# Altium PCB main_pcb2.PcbDoc
Units mm, origin at the board's own origin, x right, y up, seen from the top; angles counter-clockwise.
Board outline 20 x 50 mm, 2 copper layers (Top Layer, Bottom Layer); 44 components, 28 nets, 160 pads, 32 vias.
Unrouted connection lines stored in the file: 110.
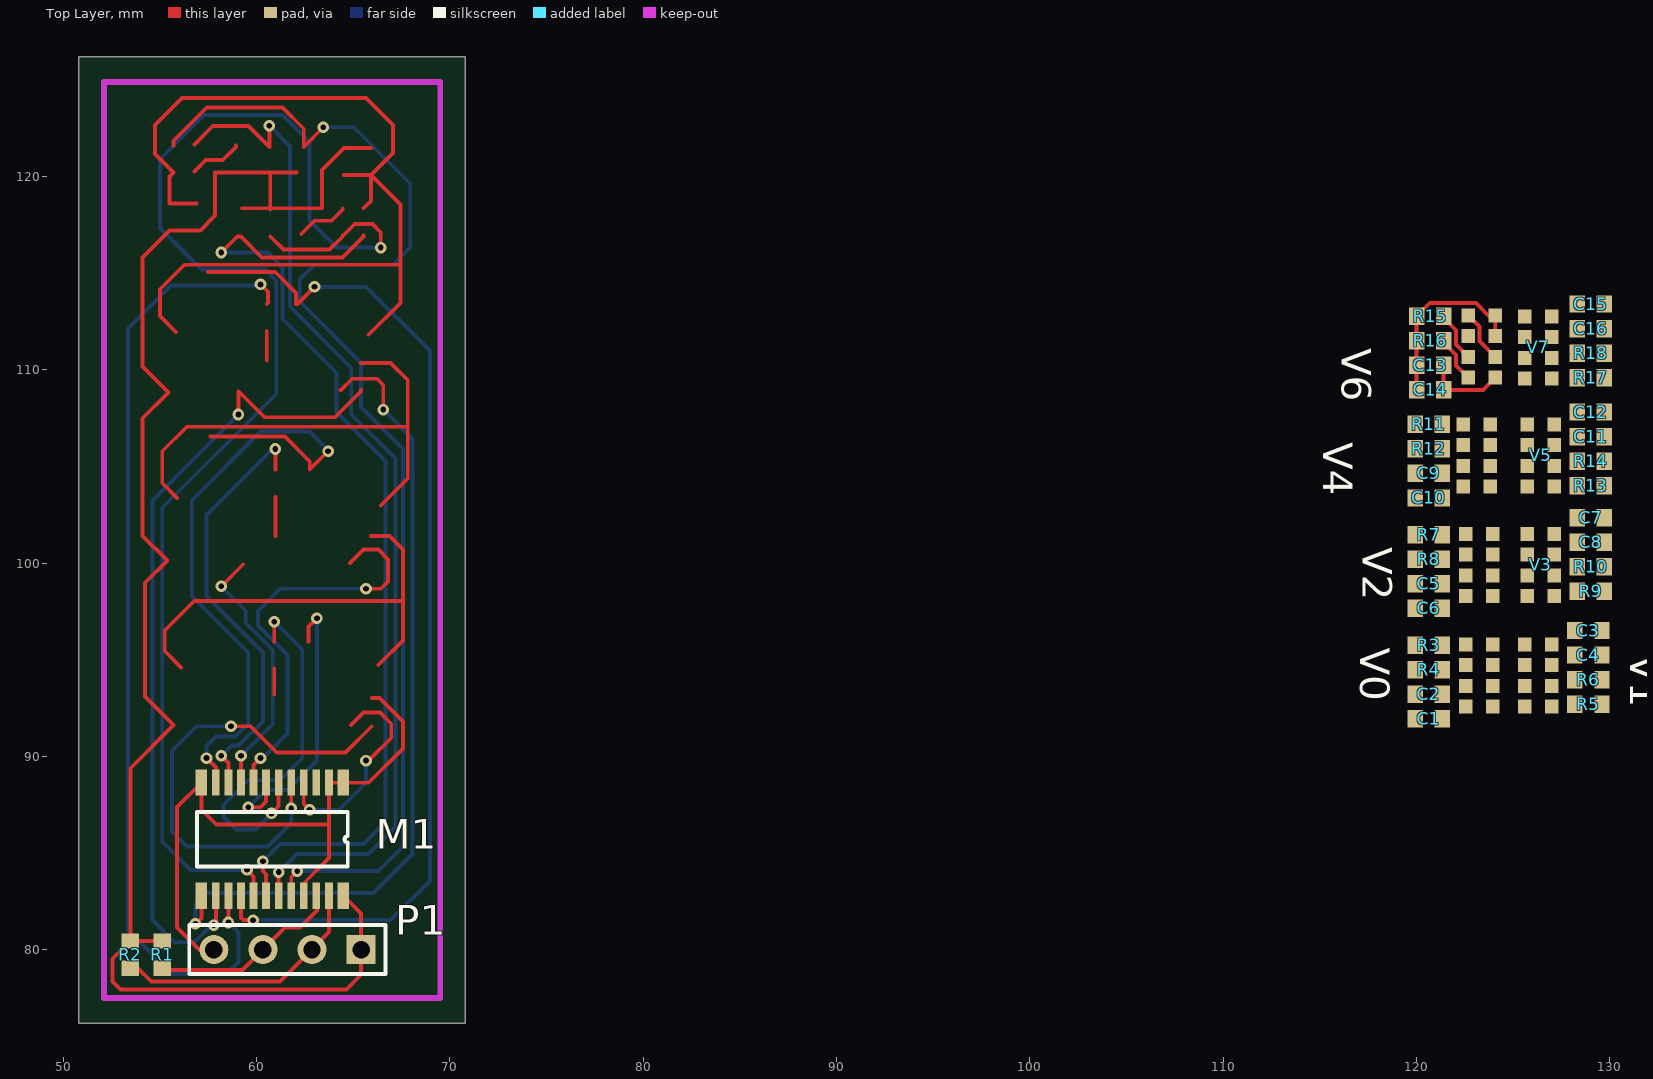
[diagram p0: Top Layer view]
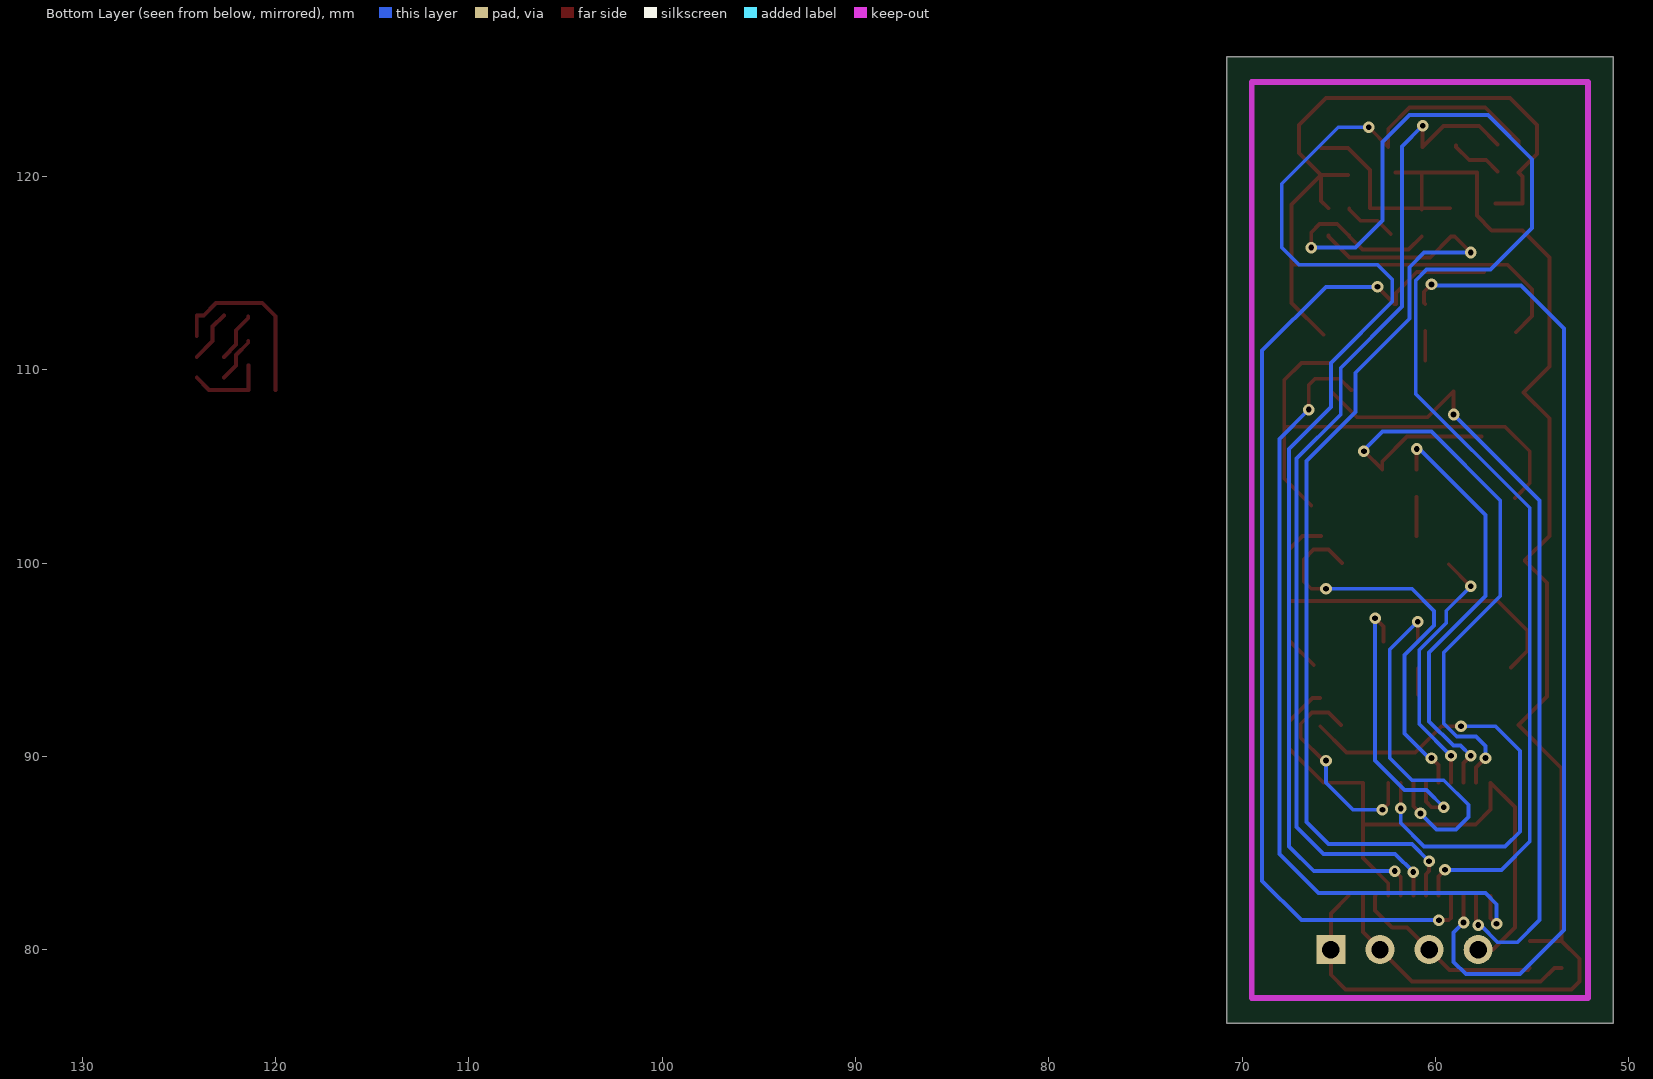
[diagram p1: Bottom Layer view, seen from below]

## Layer stack, top to bottom
Top Solder: solder mask 0.0102, Solder Resist, Dk 3.5
Top Layer: signal copper 0.0356
Dielectric 1: dielectric 0.32, FR-4, Dk 4.8
Bottom Layer: signal copper 0.0356
Bottom Solder: solder mask 0.0102, Solder Resist, Dk 3.5

## Board outline
50.8,76.2 70.8,76.2 70.8,126.2 50.8,126.2

## Design rules (kind name [scope] priority, off if disabled: settings)
Clearance [All] p1: gap=0.13
FabricationTestPointUsage TestPointUsage [All] p1: valid=0 allowmultiple=FALSE
FabricationTestpoint Testpoint [All] p1: side=3 testpointundercomponent=TRUE minsize=1.016 maxsize=2.54 preferedsize=1.524 minholesize=0 maxholesize=1.016 preferedholesize=0.813 testpointgrid=0.025 allowsidetop=TRUE allowsidebottom=TRUE usegrid=TRUE gridtolerance=0
HoleSize [All] p1: absolutevalues=TRUE maxlimit=3.9 minlimit=0.2 maxpercent=80.000 minpercent=20.000
HoleToHoleClearance [All] p1: gap=0.3 allowstackedmicrovias=TRUE
MinimumSolderMaskSliver [All] p1: minsoldermaskwidth=0.1
PlaneConnect [All] p1: planeconnectstyle=Relief reliefexpansion=0.5 reliefentries=4 reliefconductorwidth=0.4 reliefairgap=0.4
PolygonConnect [All] p1: connectstyle=Relief reliefconductorwidth=0.4 reliefentries=4 polygonreliefangle="90 Angle" airgapwidth=0.4
RoutingVias [All] p1: holewidth=0.3 width=0.6 viastyle="Through Hole" minholewidth=0.3 minwidth=0.6 maxholewidth=0.3 maxwidth=0.6
SilkToBoardRegionClearance UnpouredPolygon [All] p2:
SilkToSilkClearance [All] p1: silktosilkclearance=0
SilkToSolderMaskClearance SilkscreenOverComponentPads [IsPad] p1: minsilkscreentomaskgap=0 clearancetoexposedcopper=TRUE
SolderMaskExpansion [All] p1: expansion=-0.01
Width Power_Width [(InNet('5V') OR InNet('3V3') OR InNet('VCC') OR InNet('GND'))] p1: maxlimit=1 minlimit=0.2 preferedwidth=1 minimp=50.000000 maximp=50.000000 favimp=50.000000
Width [All] p2: maxlimit=1 minlimit=0.2 preferedwidth=0.2 minimp=50.000000 maximp=50.000000 favimp=50.000000
21 further rules are at their usual default settings.

## Classes and differential pairs
component class main_schematic: C13 C14 M1 P1 R1 R2 R15 R16 V6

## Components (designator, comment, footprint, x,y, rotation, side; value= is the part's Value field where it differs from the comment)
C1 "Cap" 1608[0603] 120.65,91.948 r180 top
C2 "Cap" 1608[0603] 120.65,93.218 r180 top
C3 "Cap" 1608[0603] 128.905,96.52 r0 top
C4 "Cap" 1608[0603] 128.905,95.25 r0 top
C5 "Cap" 1608[0603] 120.65,98.933 r180 top
C6 "Cap" 1608[0603] 120.65,97.663 r180 top
C7 "Cap" 1608[0603] 129.032,102.362 r0 top
C8 "Cap" 1608[0603] 129.032,101.092 r0 top
C9 "Cap" 1608[0603] 120.65,104.648 r180 top
C10 "Cap" 1608[0603] 120.65,103.378 r180 top
C11 "Cap" 1608[0603] 129.032,106.553 r0 top
C12 "Cap" 1608[0603] 129.032,107.823 r0 top
C13 "Cap" 1608[0603] 120.712,110.236 r180 top
C14 "Cap" 1608[0603] 120.712,108.966 r180 top
C15 "Cap" 1608[0603] 129.032,113.411 r0 top
C16 "Cap" 1608[0603] 129.032,112.141 r0 top
M1 "PCA9547" TSSOP24 64.389,88.646 r270 top
P1 "Header 4" HDR1X4 65.405,80.01 r180 top
R1 "Res1" 1608[0603] 55.118,79.756 r90 top
R2 "Res1" 1608[0603] 53.467,79.756 r90 top
R3 "Res1" 1608[0603] 120.65,95.758 r180 top
R4 "Res1" 1608[0603] 120.65,94.488 r180 top
R5 "Res1" 1608[0603] 128.905,92.71 r0 top
R6 "Res1" 1608[0603] 128.905,93.98 r0 top
R7 "Res1" 1608[0603] 120.65,101.473 r180 top
R8 "Res1" 1608[0603] 120.65,100.203 r180 top
R9 "Res1" 1608[0603] 129.032,98.552 r0 top
R10 "Res1" 1608[0603] 129.032,99.822 r0 top
R11 "Res1" 1608[0603] 120.65,107.188 r0 top
R12 "Res1" 1608[0603] 120.65,105.918 r0 top
R13 "Res1" 1608[0603] 129.032,104.013 r0 top
R14 "Res1" 1608[0603] 129.032,105.283 r0 top
R15 "Res1" 1608[0603] 120.712,112.776 r0 top
R16 "Res1" 1608[0603] 120.712,111.506 r0 top
R17 "Res1" 1608[0603] 129.032,109.601 r180 top
R18 "Res1" 1608[0603] 129.032,110.871 r180 top
V0 "VCNL4040" SOP8 123.955,92.583 r180 top
V1 "VCNL4040" SOP8 125.6,95.808 r0 top
V2 "VCNL4040" SOP8 123.955,98.298 r180 top
V3 "VCNL4040" SOP8 125.73,101.523 r0 top
V4 "VCNL4040" SOP8 123.828,103.963 r180 top
V5 "VCNL4040" SOP8 125.73,107.188 r0 top
V6 "VCNL4040" SOP8 124.079,109.601 r180 top
V7 "VCNL4040" SOP8 125.6,112.776 r0 top

## Footprints (in the part's own frame and the unit in brackets; to place one, negate y for a bottom-side part, rotate by r counter-clockwise, add the part's x,y. Pads: shape width x height; smd on the part's side, far side on the other; paste and mask are expansions set on the pad)
1608[0603] [mm] "Chip Capacitor, Body 1.6x0.8mm, IPC High Density"
  rect 0.8x0.9 smd: 1(-0.7,0) 2(0.7,0)
  body extent -0.87,-0.48 0.87,0.48, height 1.3
HDR1X4 [mm] "Connector; Header; 4 Position"
  rect 1.5x1.5 hole 0.9: 1(0,0)
  round 1.5 hole 0.9: 2(2.54,0) 3(5.08,0) 4(7.62,0)
  silkscreen extent -1.27,-1.27 8.89,1.27
SOP8 [mm]
  rect 0.7x0.725 smd: 1(0,0) 2(0,-1.075) 3(0,-2.15) 4(0,-3.225) 5(1.4,-3.225) 6(1.4,-2.15) 7(1.4,-1.075) 8(1.4,0)
TSSOP24 [mm]
  rect 1.35x0.6 smd: 1(0,0.1) 12(0,-7.25) 13(5.85,-7.25) 24(5.85,0.1)
  rect 1.35x0.4 smd: 2(0,-0.65) 3(0,-1.3) 4(0,-1.95) 5(0,-2.6) 6(0,-3.25) 7(0,-3.9) 8(0,-4.55) 9(0,-5.2) 10(0,-5.85) 11(0,-6.5) 14(5.85,-6.5) 15(5.85,-5.85) 16(5.85,-5.2) 17(5.85,-4.55) 18(5.85,-3.9) 19(5.85,-3.25) 20(5.85,-2.6) 21(5.85,-1.95) 22(5.85,-1.3) 23(5.85,-0.65)
  silkscreen extent 1.51,-7.48 4.34,0.33

## Part data
C1 C2 C3 C4 C5 C6 C7 C8 C9 C10 C11 C12 C13 C14 C15 C16: "Capacitor"
P1: "Header, 4-Pin"
R1 R2 R3 R4 R5 R6 R7 R8 R9 R10 R11 R12 R13 R14 R15 R16 R17 R18: "Resistor"
V0 V1 V2 V3 V4 V5 V6 V7: library part Component_1

## Via types
v1: diameter 0.6, hole 0.3, Top Layer to Bottom Layer, 32 vias

## Nets (pads, with @x,y where several pads share a name; then routed paths per layer and width w, separated by ;. In a path a pad name is that pad's centre, name@x,y a point inside that pad or via, vN(x,y) a via of type N, cw(c..) or ccw(c..) an arc to the next point about the centre after c; other vN are vias at no path point)
GND: C1.1 C2.1 C3.1 C4.1 C5.1 C6.1 C7.1 C8.1 C9.1 C10.1 C11.1 C12.1 C13.1 C14.1 C15.1 C16.1 M1.1 M1.2 M1.12 M1.21 P1.4 V0.1 V1.1 V2.1 V3.1 V4.1 V5.1 V6.1 V7.1 | length 137.7
  Top Layer w0.2: 55.821,111.953 54.991,112.783 54.991,114.173 56.261,115.443 67.437,115.443 ; 55.886,103.378 55.118,104.146 55.118,105.791 56.388,107.061 67.818,107.061 ; 56.084,94.615 55.245,95.454 55.245,96.52 56.769,98.044 67.564,98.044 ; 56.896,118.621 55.499,118.621 55.499,120.003 55.703,120.207 54.737,121.173 54.737,122.682 56.134,124.079 65.659,124.079 67.056,122.682 67.056,121.223 65.913,120.08 ; P1.4 57.023,80.01 55.88,81.153 55.88,87.387 M1.12 57.139,87.26 57.912,86.487 63.739,86.487 ; M1.21 62.439,83.445 63.739,84.745 M1.2 M1.1 65.786,88.646 67.564,90.424 67.564,91.821 66.356,93.029 65.953,93.029 ; 64.516,120.08 65.913,120.08 ; 65.405,110.363 66.929,110.363 67.818,109.474 67.818,107.061 ; 65.532,118.367 65.913,118.748 65.913,120.08 ; 65.786,111.822 67.437,113.473 67.437,118.556 65.913,120.08 ; 65.913,101.408 66.867,101.408 67.564,100.711 67.564,96.012 66.294,94.742 ; 66.421,102.994 67.818,104.391 67.818,107.061 ; C13.1 C14.1 123.444,108.966 V6.1
NetC1_2: C1.2 C2.2 C3.2 C4.2 C5.2 C6.2 C7.2 C8.2 C9.2 C10.2 C11.2 C12.2 C13.2 C14.2 C15.2 C16.2 M1.24 P1.1 R1.2 R2.2 R3.2 R4.2 R5.2 R6.2 R7.2 R8.2 R9.2 R10.2 R11.1 R12.1 R13.2 R14.2 R15.1 R16.1 R17.1 R18.1 V0.3 V0.4 V1.3 V1.4 V2.3 V2.4 V3.3 V3.4 V4.3 V4.4 V5.3 V5.4 V6.3 V6.4 V7.3 V7.4 | length 97.4
  Top Layer w0.2: R1.2 R2.2 ; 59.244,118.367 60.706,118.367 ; 60.52,110.487 60.52,111.953 60.52,112.015 ; 60.706,118.305 60.706,118.367 ; 60.706,120.157 60.706,118.367 ; 60.91,93.206 60.91,94.55 ; 60.966,101.414 60.966,103.378 60.966,103.44 ; 62.077,120.207 58.928,120.207 57.853,120.207 57.853,117.989 57.085,117.221 56.896,117.221 55.499,117.221 54.102,115.824 54.102,110.178 55.44,108.84 54.102,107.502 54.102,101.414 55.378,100.138 54.229,98.989 54.229,93.103 55.703,91.629 53.467,89.393 R2.2 ; M1.24 65.405,81.88 65.405,78.712 64.643,77.95 52.959,77.95 52.55,78.359 52.55,79.539 R2.2 ; 65.913,121.48 64.516,121.48 63.382,120.346 63.382,118.367 60.706,118.367 ; C14.2 C13.2 120.012,112.773 120.015,112.776 120.695,113.456 123.087,113.456 123.717,112.826 V6.4 V6.3
NetM1_4: M1.4 R3.1 V0.7 | length 11.2
  Top Layer w0.2: M1.4 62.439,87.548 v1(62.738,87.249) ; 64.878,91.629 65.532,92.283 66.375,92.283 66.965,91.694 66.965,90.968 v1@65.786,89.789
  Bottom Layer w0.2: v1(62.738,87.249) 64.262,87.249 65.659,88.646 v1(65.659,89.789)
NetM1_5: M1.5 R4.1 V0.8 | length 25.2
  Top Layer w0.2: v1(58.674,91.567) 59.69,91.567 61.041,90.216 64.601,90.216 65.953,91.567 ; v1(61.789,87.316) M1.5
  Bottom Layer w0.2: v1(58.674,91.567) 56.896,91.567 55.626,90.297 55.626,86.106 56.388,85.344 60.579,85.344 61.782,86.547 61.789,86.547 v1(61.789,87.316)
NetM1_6: M1.6 R5.1 V1.7 | length 19.2
  Top Layer w0.2: v1(60.77,87.058) 61.139,87.428 M1.6 ; 60.91,95.95 v1(60.91,96.978)
  Bottom Layer w0.2: v1(60.77,87.058) 59.944,86.233 58.928,86.233 58.293,86.868 58.293,87.503 59.563,88.773 61.214,88.773 62.357,89.916 62.357,95.531 v1(60.91,96.978)
NetM1_7: M1.7 R6.1 V1.8 | length 15.3
  Top Layer w0.2: v1(59.563,87.376) 60.198,87.376 60.489,87.667 M1.7 ; 62.688,95.95 62.688,96.012 62.688,96.724 v1(63.119,97.155)
  Bottom Layer w0.2: v1(59.563,87.376) 60.452,88.265 61.595,88.265 63.119,89.789 v1(63.119,97.155)
NetM1_8: M1.8 R7.1 V2.7 | length 21.3
  Top Layer w0.2: M1.8 59.839,89.557 v1(60.198,89.916) ; 64.838,100.008 65.532,100.702 66.303,100.702 66.802,100.203 66.802,99.06 66.421,98.679 v1(65.659,98.679)
  Bottom Layer w0.2: v1(60.198,89.916) 60.325,89.916 61.595,91.186 61.595,95.25 60.071,96.774 60.071,97.536 61.214,98.679 v1(65.659,98.679)
NetM1_9: M1.9 R8.1 V2.8 | length 13.6
  Top Layer w0.2: v1(58.169,98.806) 59.309,99.946 ; M1.9 v1(59.189,90.036)
  Bottom Layer w0.2: v1(58.169,98.806) 59.436,97.539 59.436,96.901 60.833,95.504 60.833,91.68 v1(59.189,90.036)
NetM1_10: M1.10 R9.1 V3.7 | length 22.4
  Top Layer w0.2: v1(58.166,90.043) 58.539,89.67 M1.10 ; 60.966,104.84 v1(60.966,105.912)
  Bottom Layer w0.2: v1(58.166,90.043) 58.689,90.566 59.07,90.566 60.325,91.821 60.325,95.377 57.404,98.298 57.404,102.489 60.827,105.912 v1(60.966,105.912)
NetM1_11: M1.11 R10.1 V3.8 | length 33.9
  Top Layer w0.2: v1(57.404,89.916) 57.889,89.431 M1.11 ; 57.599,106.553 61.468,106.553 62.744,105.277 62.744,104.84 v1(63.695,105.791)
  Bottom Layer w0.2: v1(57.404,89.916) 57.404,90.551 57.89,91.037 58.894,91.037 59.563,91.706 59.563,95.377 56.642,98.298 56.642,103.251 60.198,106.807 62.738,106.807 v1@63.695,105.85
NetM1_13: M1.13 R11.2 V4.7 | length 42.4
  Top Layer w0.2: v1(56.832,81.343) 57.139,81.65 M1.13 ; 64.33,108.963 64.367,108.963 64.947,109.543 66.225,109.543 66.548,109.22 v1(66.548,107.95)
  Bottom Layer w0.2: v1(56.832,81.343) 56.832,82.359 57.404,82.931 66.04,82.931 68.072,84.963 68.072,106.426 v1(66.548,107.95)
NetM1_14: M1.14 R12.2 V4.8 | length 42.2
  Top Layer w0.2: v1@57.889,81.384 M1.14 ; v1(59.055,107.696) 59.055,108.901 60.406,107.55 64.054,107.55 65.405,108.901 65.405,108.963
  Bottom Layer w0.2: v1(57.785,81.28) 57.669,81.28 56.78,80.391 55.753,80.391 54.61,81.534 54.61,103.251 v1(59.055,107.696)
NetM1_15: M1.15 R13.1 V5.7 | length 50.6
  Top Layer w0.2: v1(58.539,81.415) M1.15 ; v1(60.198,114.427) 60.579,114.046 60.579,113.474 60.52,113.415
  Bottom Layer w0.2: v1(58.539,81.415) 59.055,80.899 59.055,79.375 58.42,78.74 55.626,78.74 53.34,81.026 53.34,112.141 55.567,114.368 v1@60.139,114.368
NetM1_16: M1.16 R14.1 V5.8 | length 53.2
  Top Layer w0.2: 57.469,115.062 60.96,115.062 62.044,113.978 62.044,113.415 62.107,113.415 v1(62.992,114.3) ; M1.16 59.189,81.654 59.309,81.534 v1@59.563,81.534
  Bottom Layer w0.2: v1(59.817,81.534) 66.929,81.534 68.961,83.566 68.961,110.998 65.659,114.3 v1(62.992,114.3)
NetM1_17: M1.17 R15.2 V6.7 | length 76.3
  Top Layer w0.2: v1(59.499,84.138) 59.839,83.798 M1.17 ; 60.706,116.905 61.387,116.224 63.776,116.224 64.457,116.905 ; 64.457,116.967 64.494,116.967 65.074,117.547 65.99,117.547 66.421,117.116 v1(66.421,116.332) ; R15.2@121.415,112.776 121.415,112.681 122.045,112.051 122.045,111.31 V6.7
  Bottom Layer w0.2: v1(59.499,84.138) 56.578,84.138 55.118,85.598 55.118,102.87 61.011,108.763 61.011,114.63 60.452,115.189 57.15,115.189 54.991,117.348 54.991,120.904 57.277,123.19 61.341,123.19 62.738,121.793 62.738,117.729 64.135,116.332 v1(66.421,116.332)
NetM1_18: M1.18 R16.2 V6.8 | length 54.5
  Top Layer w0.2: v1(58.166,116.078) 58.993,116.905 59.182,116.905 60.263,115.824 64.451,115.824 65.532,116.905 65.532,116.967 ; v1(60.325,84.582) 60.325,84.074 60.489,83.91 M1.18 ; R16.2@121.415,111.506 121.415,111.408 122.042,110.781 122.042,110.238 V6.8
  Bottom Layer w0.2: v1(58.166,116.078) 60.579,116.078 61.341,115.316 61.341,112.649 64.135,109.855 64.135,107.823 66.675,105.283 66.675,86.614 65.532,85.471 61.214,85.471 v1(60.325,84.582)
NetM1_19: M1.19 R17.2 V7.7 | length 53
  Top Layer w0.2: 56.778,121.669 57.729,122.62 59.578,122.62 60.656,121.542 v1(60.656,122.632) ; M1.19 v1(61.139,84.022)
  Bottom Layer w0.2: v1(60.656,122.632) 61.722,121.566 61.722,113.284 64.897,110.109 64.897,107.696 67.183,105.41 67.183,86.36 65.786,84.963 62.08,84.963 v1(61.139,84.022)
NetM1_20: M1.20 R18.2 V7.8 | length 64.9
  Top Layer w0.2: 55.703,121.607 55.703,121.858 57.416,123.571 61.341,123.571 62.434,122.478 62.434,121.542 v1(63.447,122.555) ; M1.20 61.789,83.76 v1(62.103,84.074)
  Bottom Layer w0.2: v1(62.103,84.074) 66.294,84.074 67.564,85.344 67.564,105.918 65.405,108.077 65.405,110.363 62.23,113.538 62.23,114.681 62.992,115.443 67.056,115.443 67.945,116.332 67.945,119.634 65.024,122.555 v1(63.447,122.555)
NetM1_22: M1.22 P1.3 R1.1 | length 10
  Top Layer w0.2: R1.1 55.214,78.96 59.275,78.96 P1.3 61.468,81.153 62.23,81.153 ; 62.26,81.183 63.119,82.042 63.119,82.766 M1.22
NetM1_23: M1.23 P1.2 R2.1 | length 13.5
  Top Layer w0.2: R2.1 53.844,79.056 54.544,78.356 61.211,78.356 P1.2 ; P1.2@62.865,80.04 63.739,80.914 M1.23
NetV0_2: V0.2 V0.5
NetV1_2: V1.2 V1.5
NetV2_2: V2.2 V2.5
NetV3_2: V3.2 V3.5
NetV4_2: V4.2 V4.5
NetV5_2: V5.2 V5.5
NetV6_2: V6.2 V6.5 | length 5.5
  Top Layer w0.2: 62.307,117.032 62.992,117.717 63.869,117.717 64.457,118.305 64.457,118.367 ; V6.5 123.259,112.246 123.259,111.496 V6.2
NetV7_2: V7.2 V7.5 | length 2.7
  Top Layer w0.2: 56.778,120.269 57.366,120.857 58.243,120.857 58.928,121.542 58.928,121.607
pads on no net: M1.3 V0.6 V1.6 V2.6 V3.6 V4.6 V5.6 V6.6 V7.6

## Keep-outs
Keep-Out Layer:
  lines w0.3: 52.1,77.5 52.1,124.9 69.5,124.9 69.5,77.5 52.1,77.5

## Silkscreen, mask and mechanical layers (free items; w line width, h text height)
Drill Drawing:
  text ".LEGEND" at 75.88,81.28 h1.52
  text "Drill Drawing." at 75.88,78.74 h1.52

## Dimensions
52.1,77.5 to 52.1,124.9 on Mechanical 1
52.1,77.5 to 69.5,77.5 on Mechanical 1